# Altium PCB PCB_monitoring_ConnectA10.PcbDoc
Units mm, origin at the board's own origin, x right, y up, seen from the top; angles counter-clockwise.
Board outline 35 x 60 mm, 2 copper layers (Top Layer, Bottom Layer), stack 1.571 mm thick; 9 components, 14 nets, 190 pads, 7 vias.
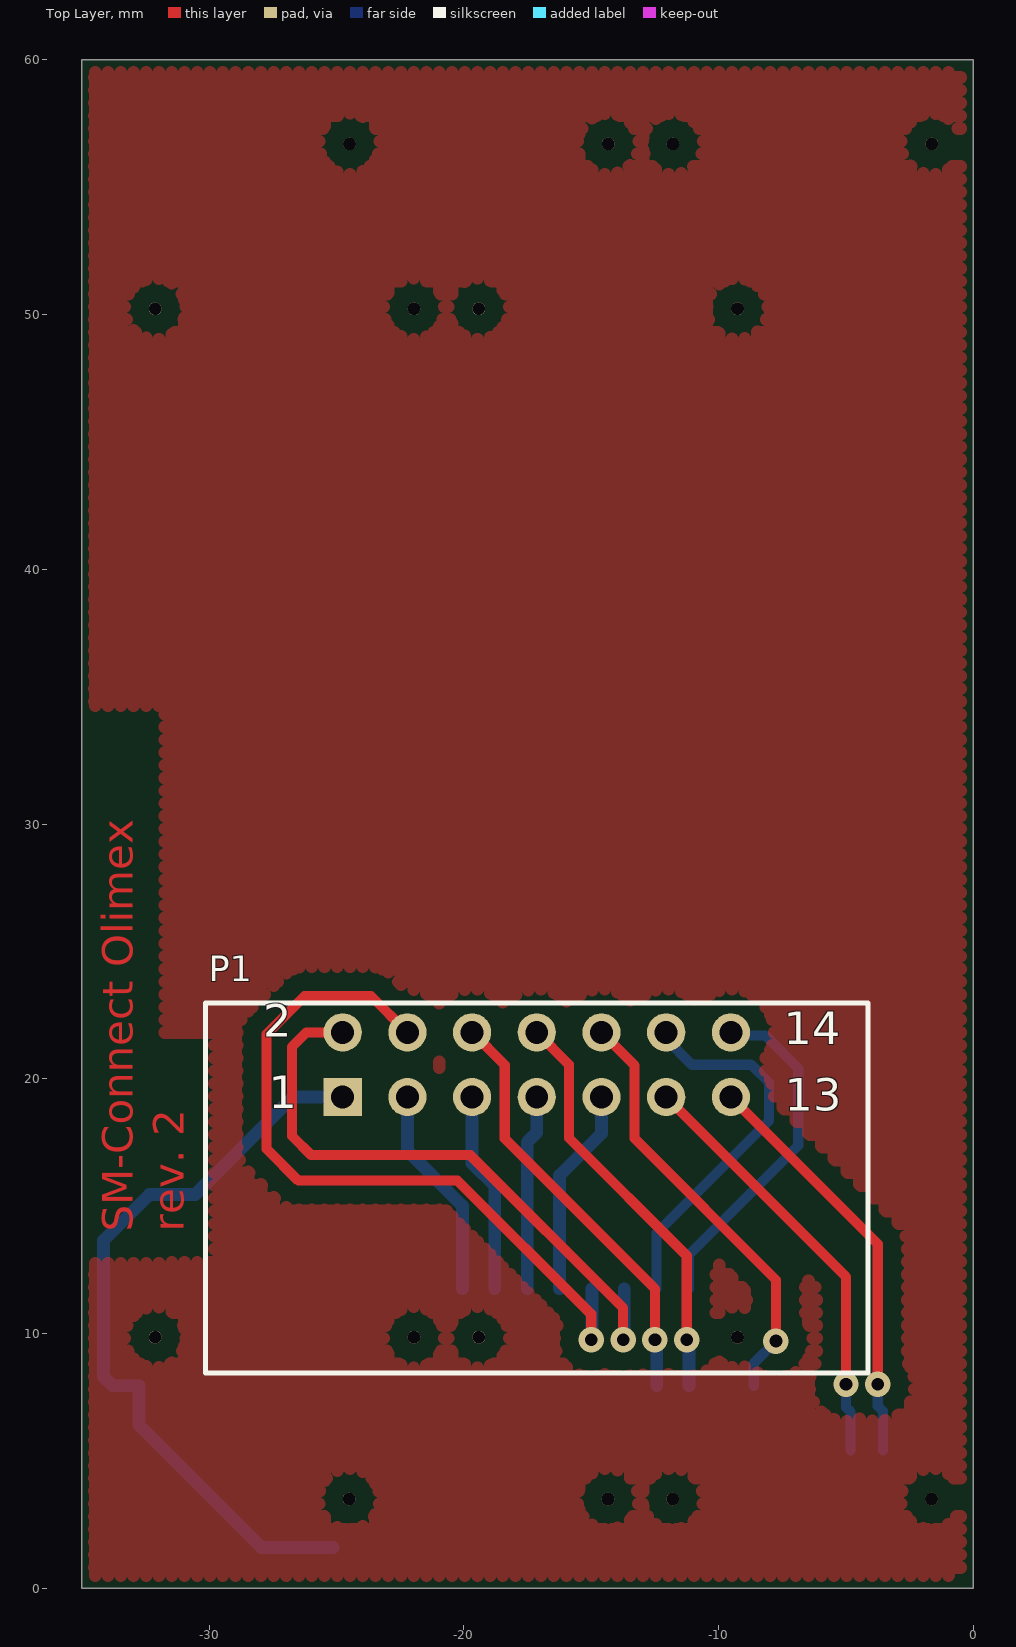
[diagram p0: Top Layer view]
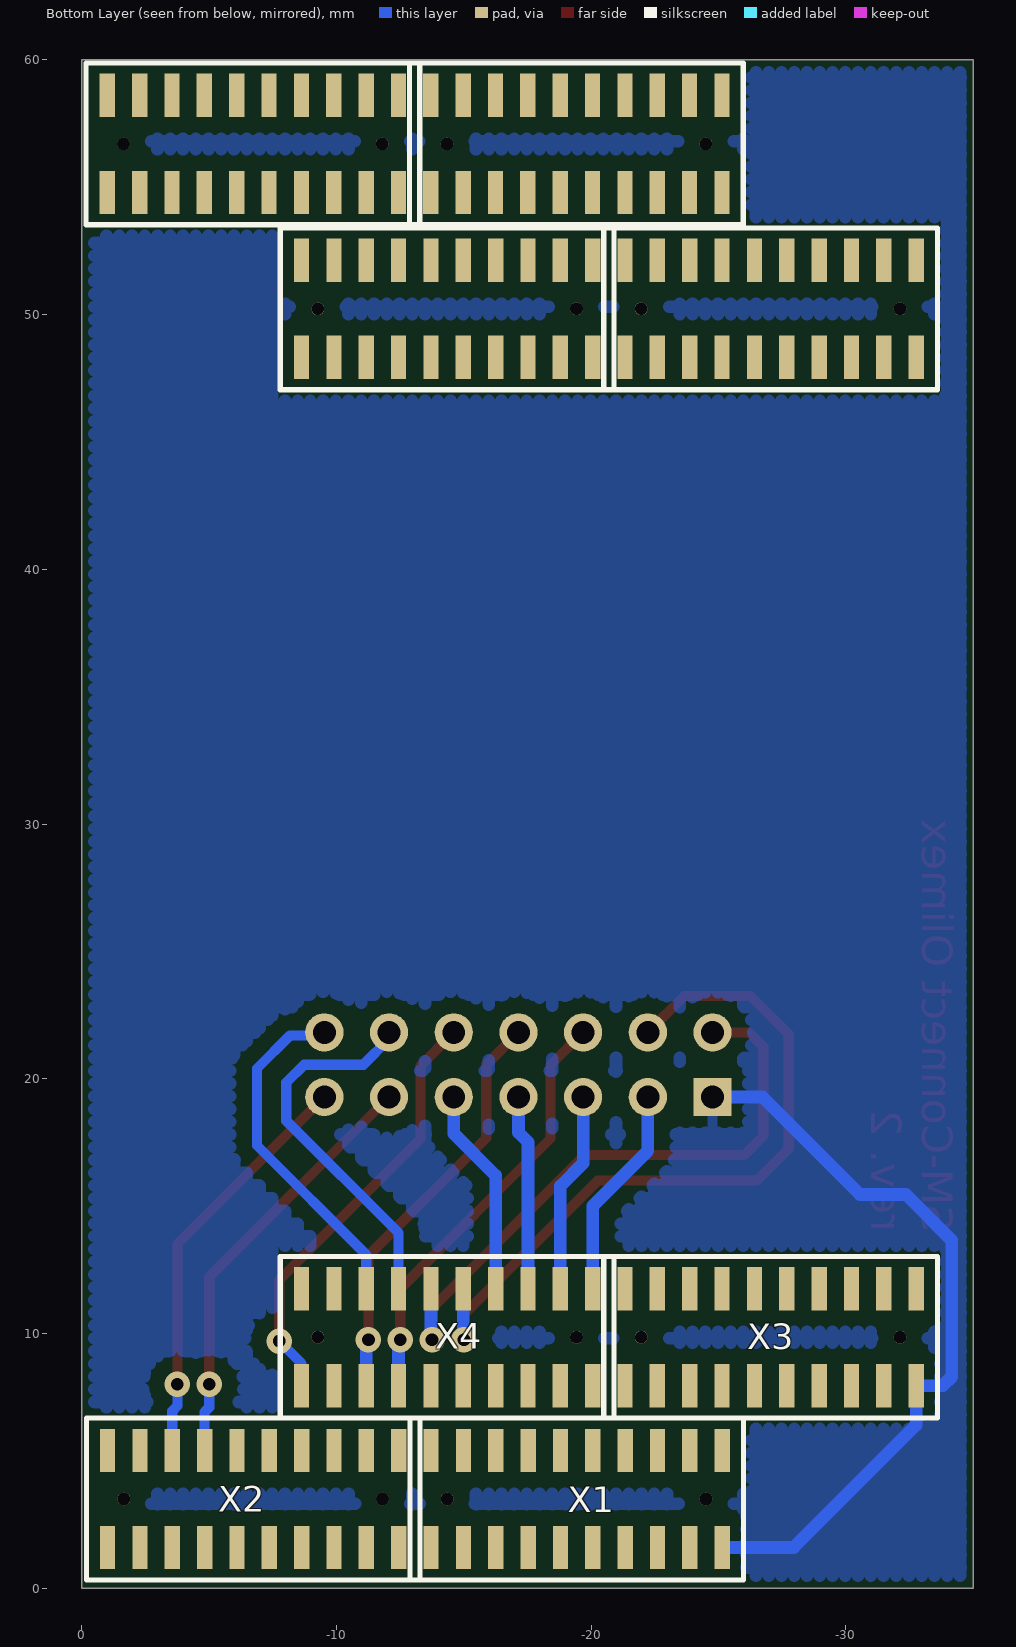
[diagram p1: Bottom Layer view, seen from below]
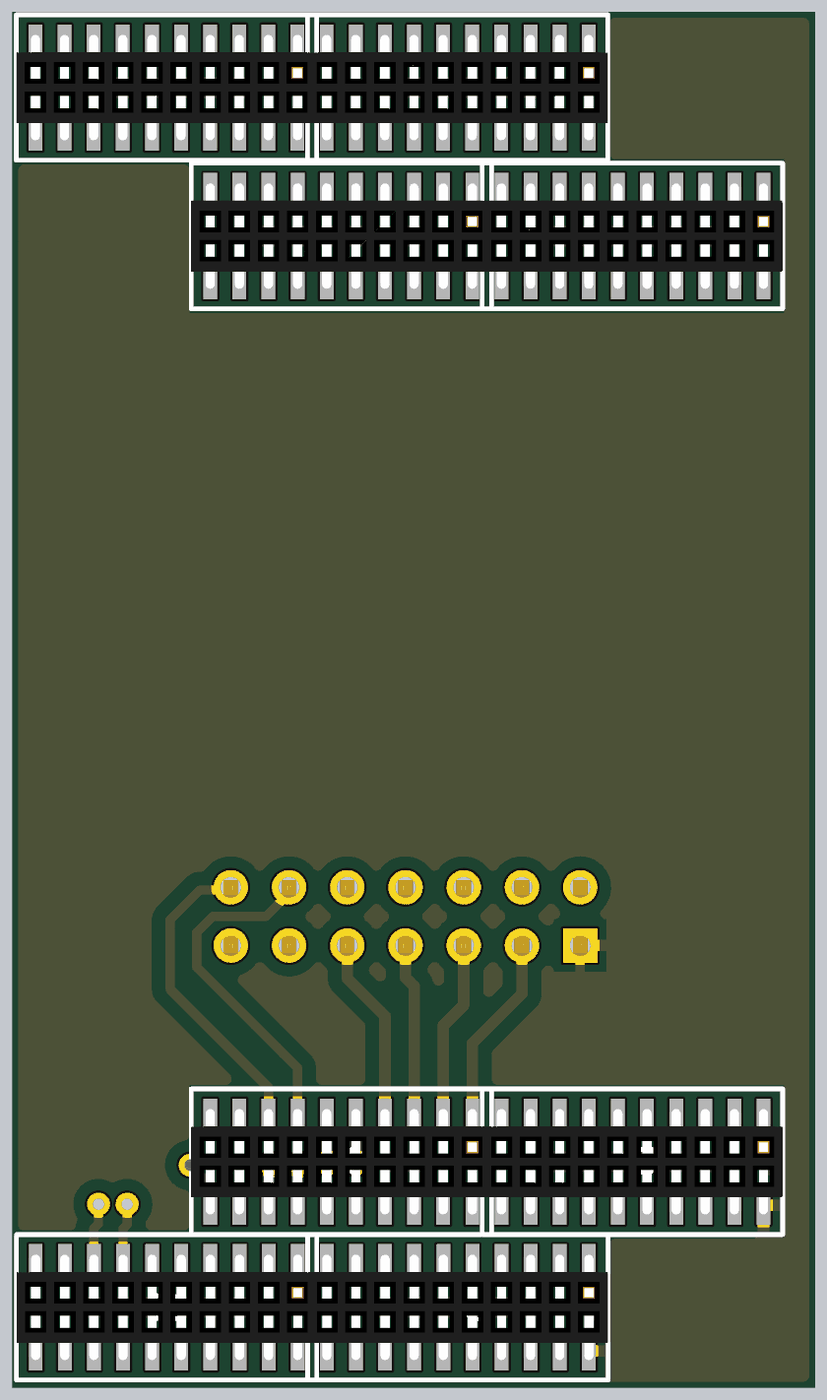
[diagram p2: 3D render of the assembled board from below, using the file's embedded part models]

## Layer stack, top to bottom
Top Solder: solder mask 0.0102, Solder Resist, Dk 3.5
Top Layer: signal copper 0.0356
Dielectric 1: dielectric 1.5, FR-4, Dk 4.8
Bottom Layer: signal copper 0.0356
Bottom Solder: solder mask 0.0102, Solder Resist, Dk 3.5

## Board outline
-35,0 0,0 0,60 -35,60

## Design rules (kind name [scope] priority, off if disabled: settings)
Clearance Clearance_3 [InPolygon And InNetClass('GND')] p1: gap=0.4
Clearance Clearance_2 [InPolygon And OnLayer('Bottom Layer')] p2: gap=0.6
Clearance Clearance_1 [InPolygon And OnLayer('Top Layer')] p3: gap=0.7
Clearance [All] p4: gap=0.25
ComponentClearance [All] p1: gap=0 collisioncheckmode=3 verticalgap=0 showdistances=FALSE
Height [All] p1: minheight=0 maxheight=30 prefheight=12.7
HoleSize [All] p1: absolutevalues=TRUE maxlimit=5 minlimit=0.2 maxpercent=80.000 minpercent=20.000
HoleToHoleClearance [All] p1: gap=0.25 allowstackedmicrovias=TRUE
MinimumSolderMaskSliver [All] p1: minsoldermaskwidth=0
PlaneClearance [All] p1: clearance=0.5
PlaneConnect [All] p1: planeconnectstyle=Relief reliefexpansion=0.5 reliefentries=4 reliefconductorwidth=0.3 reliefairgap=0.25
PolygonConnect [All] p1: connectstyle=Relief reliefconductorwidth=0.4 reliefentries=4 polygonreliefangle="90 Angle" airgapwidth=0.4
RoutingCorners [All] p1: cornerstyle=45-Degree minsetback=2 maxsetback=2
RoutingVias [All] p1: holewidth=0.8 width=1.3 viastyle="Through Hole" minholewidth=0.3 minwidth=0.8 maxholewidth=5 maxwidth=7
SilkToBoardRegionClearance [All] p1 off:
SilkToSilkClearance [All] p1: silktosilkclearance=0
SilkToSolderMaskClearance [IsPad] p1: minsilkscreentomaskgap=0 clearancetoexposedcopper=TRUE
SolderMaskExpansion [All] p1: expansion=0.1
Width [All] p1: maxlimit=4 minlimit=0.25 preferedwidth=0.5 minimp=50.000000 maximp=50.000000 favimp=50.000000
19 further rules are at their usual default settings.

## Classes and differential pairs
component class Sheet_ConnectA10: P1 X1 X2 X3 X4

## Components (designator, comment, footprint, x,y, rotation, side; value= is the part's Value field where it differs from the comment)
P1 "BH-14R" BH-14R -17.14,20.55 r0 top
X1 "PBD2-20" PBD2-1.27-20-SMD -19.425,3.5 r0 bottom
X2 "PBD2-20" PBD2-1.27-20-SMD -6.725,3.5 r0 bottom locked
X3 "PBD2-20" PBD2-1.27-20-SMD -27.04,9.85 r0 bottom locked
X4 "PBD2-20" PBD2-1.27-20-SMD -14.34,9.85 r0 bottom locked
? "Comment" PBD2-1.27-20-SMD -6.715,56.7 r0 bottom locked
? "Comment" PBD2-1.27-20-SMD -19.415,56.7 r0 bottom locked
? "Comment" PBD2-1.27-20-SMD -14.34,50.225 r0 bottom locked
? "Comment" PBD2-1.27-20-SMD -27.04,50.225 r0 bottom locked

## Footprints (in the part's own frame and the unit in brackets; to place one, negate y for a bottom-side part, rotate by r counter-clockwise, add the part's x,y. Pads: shape width x height; smd on the part's side, far side on the other; paste and mask are expansions set on the pad)
BH-14R [mm] "Connector IDC"
  rect 1.5x1.5 hole 0.9: 1(-7.62,-1.27)
  round 1.5 hole 0.9: 2(-7.62,1.27) 3(-5.08,-1.27) 4(-5.08,1.27) 5(-2.54,-1.27) 6(-2.54,1.27) 7(0,-1.27) 8(0,1.27) 9(2.54,-1.27) 10(2.54,1.27) 11(5.08,-1.27) 12(5.08,1.27) 13(7.62,-1.27) 14(7.62,1.27)
  silkscreen extent -13,-12.1 13,2.42, body extent -13.01,-11.99 13.01,1.58, height 8.88
PBD2-1.27-20-SMD [mm] "Connector; Header; 20 Position"
  round 0.5 hole 0.5: 0(-5.08,0) 0(5.08,0)
  rect 0.6x1.7 smd: 1(-5.715,-1.905) 2(-5.715,1.905) 3(-4.445,-1.905) 4(-4.445,1.905) 5(-3.175,-1.905) 6(-3.175,1.905) 7(-1.905,-1.905) 8(-1.905,1.905) 9(-0.635,-1.905) 10(-0.635,1.905) 11(0.635,-1.905) 12(0.635,1.905) 13(1.905,-1.905) 14(1.905,1.905) 15(3.175,-1.905) 16(3.175,1.905) 17(4.445,-1.905) 18(4.445,1.905) 19(5.715,-1.905) 20(5.715,1.905)
  silkscreen extent -6.55,-3.17 6.55,3.17, body extent -6.55,-2.3 6.55,2.3, height 4.5

## Part data
P1: library part BH-14, "IDC/BH"
X1 X2 X3 X4: "Header, 20-Pin"

## Via types
v1: diameter 1, hole 0.5, Top Layer to Bottom Layer, 7 vias

## Nets (pads, with @x,y where several pads share a name; then routed paths per layer and width w, separated by ;. In a path a pad name is that pad's centre, name@x,y a point inside that pad or via, vN(x,y) a via of type N, cw(c..) or ccw(c..) an arc to the next point about the centre after c; other vN are vias at no path point)
BUTTOM_: P1.9 X4.7 | length 8.2
  Bottom Layer w0.5: X4.7 -16.245,16.205 -14.6,17.85 P1.9
CAN_RX_: P1.13 X2.15 | length 16.3
  Top Layer w0.4: P1.13 -3.75,13.51 v1(-3.75,8)
  Bottom Layer w0.4: v1(-3.75,8) -3.75,7.15 -3.55,6.95 X2.15
CAN_TX_: P1.11 X2.13 | length 16.9
  Top Layer w0.4: P1.11 -5,12.22 v1(-5,8)
  Bottom Layer w0.4: v1(-5,8) -5,7.1 -4.82,6.92 X2.13
GND_: P1.1 X1.2 X3.2 | length 29.8
  Bottom Layer w0.5: X1.2 -27.945,1.595 -32.755,6.405 X3.2 -33.795,7.945 -34.15,8.3 -34.15,13.65 -32.35,15.45 -30.55,15.45 -26.72,19.28 P1.1
LED1_RED_: P1.3 X4.1 | length 8.4
  Bottom Layer w0.5: P1.3 -22.22,17.17 -20.055,15.005 X4.1
LED2_ORANGE_: P1.5 X4.3 | length 7.9
  Bottom Layer w0.5: P1.5 -19.68,16.68 -18.785,15.785 X4.3
LED3_GREEN_: P1.7 X4.5 | length 7.7
  Bottom Layer w0.5: X4.5 -17.515,17.51 -17.14,17.885 P1.7
USART2_DE_: P1.10 X4.20 | length 17.1
  Top Layer w0.4: P1.10 -13.3,20.52 -13.3,17.65 -7.75,12.1 v1(-7.75,9.7)
  Bottom Layer w0.4: X4.20 -8.625,8.825 v1(-7.75,9.7)
USART2_RX_: P1.6 X4.14 | length 16.8
  Top Layer w0.4: P1.6 -18.4,20.54 -18.4,17.65 -12.5,11.75 v1(-12.5,9.75)
  Bottom Layer w0.5: X4.14 v1@-12.435,9.75
USART2_TX_: P1.8 X4.16 | length 16.4
  Top Layer w0.4: P1.8 -15.875,20.555 -15.875,17.675 -11.25,13.05 v1(-11.25,9.75)
  Bottom Layer w0.3: v1(-11.25,9.75) -11.225,9.75 v1@-11.165,9.69
  Bottom Layer w0.5: X4.16 v1@-11.165,9.69
USART5_RX_: P1.2 X4.11 | length 24.8
  Top Layer w0.4: P1.2 -26.18,21.82 -26.75,21.25 -26.75,17.75 -26,17 -19.75,17 -13.75,11 v1(-13.75,9.75)
  Bottom Layer w0.5: v1(-13.75,9.75) -13.705,9.795 X4.11
USART5_TX_: P1.4 X4.9 | length 29.7
  Top Layer w0.4: P1.4 -23.65,23.25 -26.25,23.25 -27.75,21.75 -27.75,17.25 -26.5,16 -20.25,16 -15,10.75 v1(-15,9.75)
  Bottom Layer w0.5: v1(-15,9.75) -14.975,9.775 X4.9
USART6_RX_: P1.14 X4.15 | length 13.7
  Bottom Layer w0.4: X4.15 -11.165,13.085 -6.875,17.375 -6.875,20.4 -8.175,21.7 -9.4,21.7 P1.14
USART6_TX_: P1.12 X4.13 | length 14.9
  Bottom Layer w0.4: X4.13 -12.435,13.94 -8.025,18.35 -8.025,19.85 -8.725,20.55 -11.05,20.55 -12.06,21.56 P1.12
pads on no net: ?.0 ?.1 ?.2 ?.3 ?.4 ?.5 ?.6 ?.7 ?.8 ?.9 ?.10 ?.11 ?.12 ?.13 ?.14 ?.15 ?.16 ?.17 ?.18 ?.19 ?.20 X1.0 X1.1 X1.3 X1.4 X1.5 X1.6 X1.7 X1.8 X1.9 X1.10 X1.11 X1.12 X1.13 X1.14 X1.15 X1.16 X1.17 X1.18 X1.19 X1.20 X2.0 X2.1 X2.2 X2.3 X2.4 X2.5 X2.6 X2.7 X2.8 X2.9 X2.10 X2.11 X2.12 X2.14 X2.16 X2.17 X2.18 X2.19 X2.20 X3.0 X3.1 X3.3 X3.4 X3.5 X3.6 X3.7 X3.8 X3.9 X3.10 X3.11 X3.12 X3.13 X3.14 X3.15 X3.16 X3.17 X3.18 X3.19 X3.20 X4.0 X4.2 X4.4 X4.6 X4.8 X4.10 X4.12 X4.17 X4.18 X4.19

## Polygon pours and split planes (outlines as drawn)
no net on Top Layer "pol_gnd" (hatched 90Degree grid 0.5 track 0.5, pour order 0): -34.5,0.5 -34.5,59.5 -0.5,59.5 -0.5,0.5
GND_ on Bottom Layer "pol_gnd" (hatched 90Degree grid 0.5 track 0.5, pour order 2): -34.5,0.5 -34.5,59.5 -0.5,59.5 -0.5,0.5

## Other copper
Top Layer:
  text "SM-Connect Olimex" at -33,14 h1.2 r90
  text "rev. 2" at -31,14 h1.2 r90

## Silkscreen, mask and mechanical layers (free items; w line width, h text height)
Mechanical 3:
  the board outline again, w0.2

## Text inside footprints (layer, text, board x,y; h text height)
P1: Top Overlay "14" at -7.435,21.35 h1.27; Top Overlay "13" at -7.41,18.75 h1.27; Top Overlay "2" at -27.87,21.65 h1.27; Top Overlay "1" at -27.67,18.85 h1.27